# Altium PCB CameraBoard.PcbDoc (part 2 of 2)
Units mm, origin at the board's own origin, x right, y up, seen from the top; angles counter-clockwise.
Board outline 100 x 85.93 mm, 4 copper layers (Top Layer, GND Layer, PWR Layer, Bottom Layer), stack 1.586 mm thick; 79 components, 56 nets, 412 pads, 150 vias.
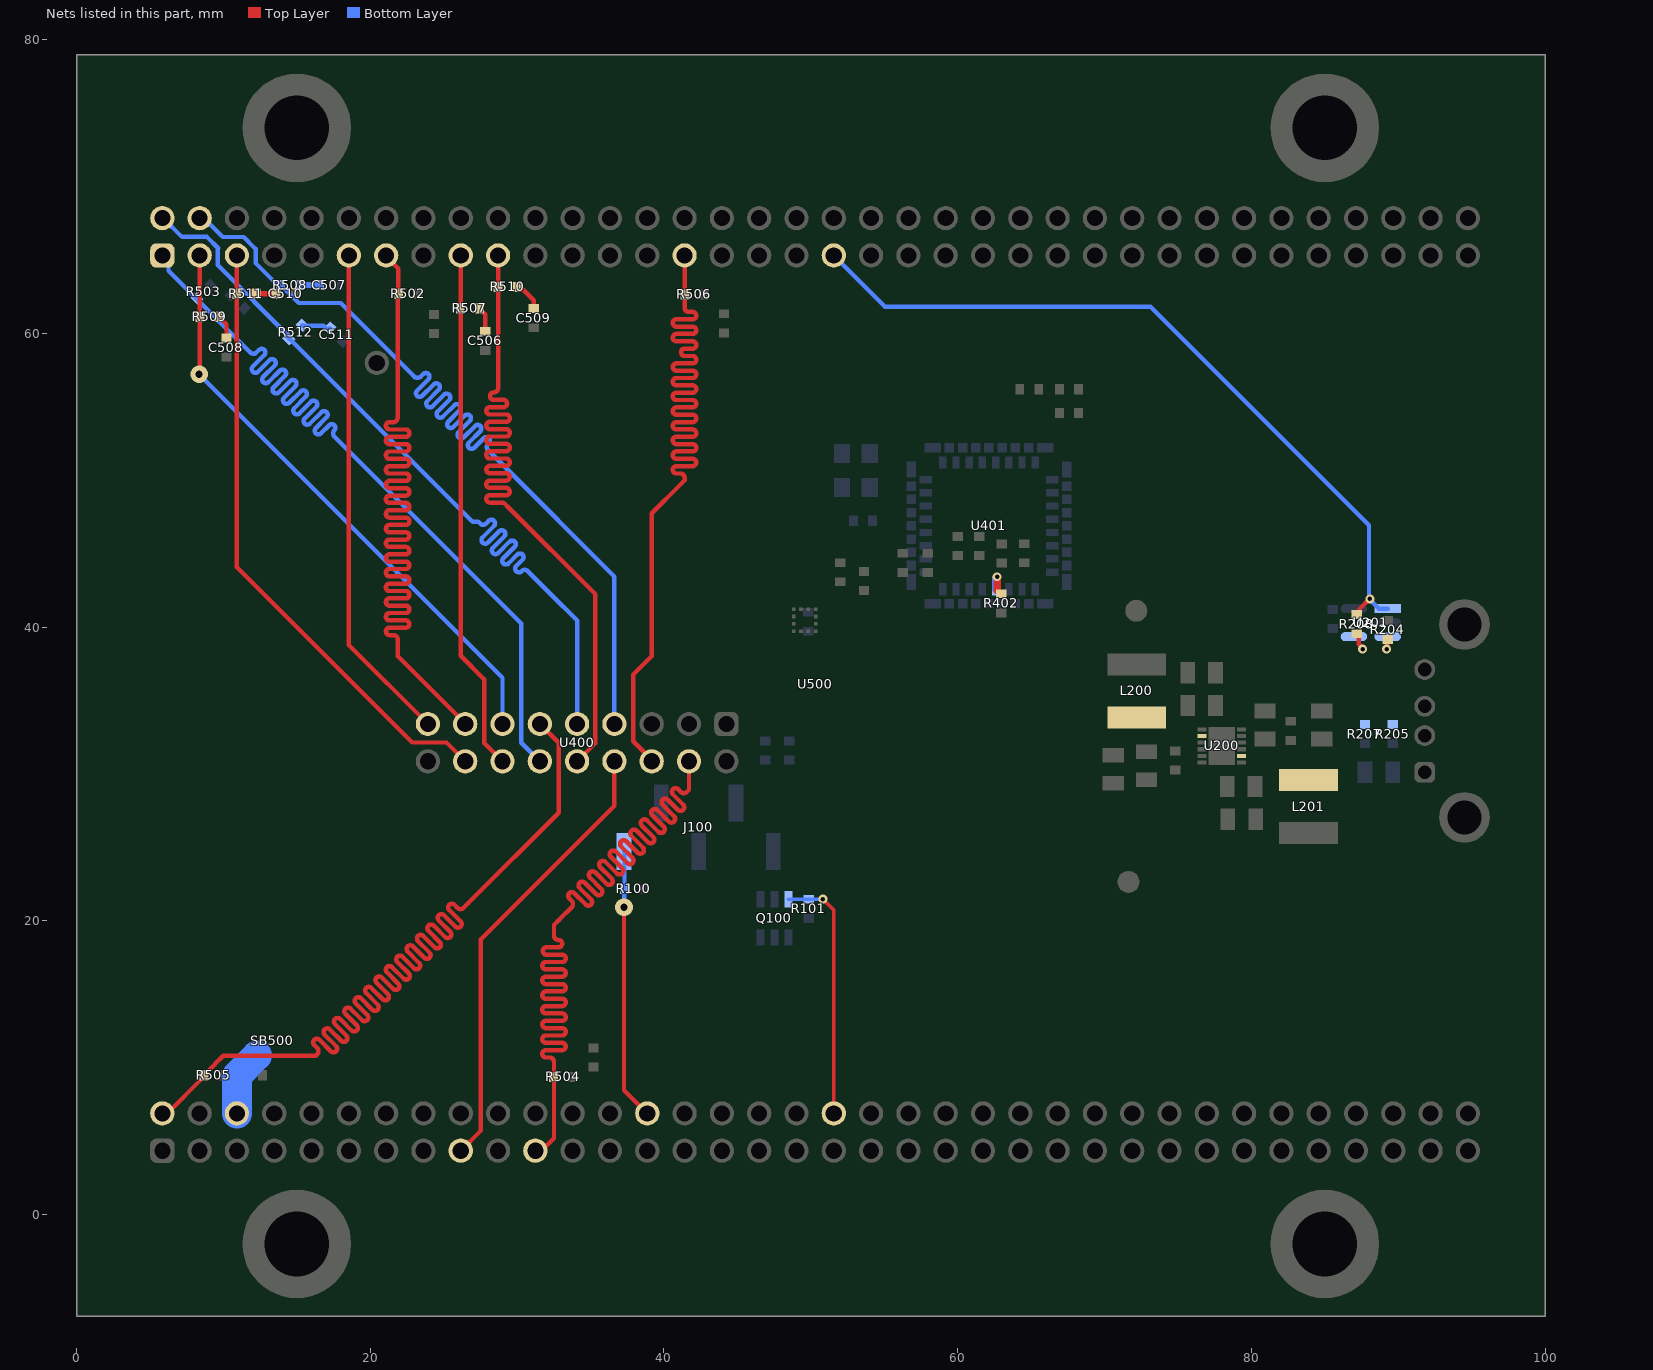
[diagram p4: the nets of this part, all layers, seen from the top]

## Via types
v1: diameter 0.61, hole 0.305, Top Layer to Bottom Layer, tented both sides, 147 vias
v2: diameter 1.2, hole 0.5, Top Layer to Bottom Layer, tented both sides, 2 vias
v3: diameter 0.635, hole 0.305, Top Layer to Bottom Layer, tented both sides, 1 vias

## Nets (pads, with @x,y where several pads share a name; then routed paths per layer and width w, separated by ;. In a path a pad name is that pad's centre, name@x,y a point inside that pad or via, vN(x,y) a via of type N, cw(c..) or ccw(c..) an arc to the next point about the centre after c; other vN are vias at no path point) (continued)
NetC506_1: C506.1 R507.1 | length 1.8
  Top Layer w0.3: R507.1@27.432,61.722 27.432,61.672 27.582,61.522 27.613,61.522 27.838,61.296 C506.1@27.838,60.152
NetC507_1: C507.1 R508.2 | length 1.4
  Bottom Layer w0.381: R508.2@15.194,63.3 C507.1@16.561,63.3 16.608,63.3 C507.1@16.612,63.297
NetC508_1: C508.1 R509.2 | length 1.7
  Top Layer w0.3: R509.2@9.707,61.138 9.707,61.088 9.857,60.938 9.907,60.938 10.211,60.634 C508.1@10.211,59.69
NetC509_1: C509.1 R510.1 | length 2.1
  Top Layer w0.3: R510.1@30.002,63.17 30.002,63.12 30.152,62.97 30.426,62.97 31.125,62.271 31.125,61.712 C509.1@31.14,61.697
NetC510_1: C510.1 R511.1 | length 1.4
  Top Layer w0.381: R511.1@12.222,62.7 13.576,62.7 C510.1@13.589,62.687
NetC511_1: C511.1 R512.2 | length 2
  Bottom Layer w0.3: R512.2@15.372,60.558 15.407,60.523 16.816,60.523 16.999,60.34 17.211,60.34 C511.1@17.247,60.376
NetJ100_1: J100.1 R100.2 U500.28 | length 18.5
  Top Layer w0.3: v2(37.28,20.93) 37.28,8.475 U500.28@38.862,6.893
  Bottom Layer w0.254: J100.1@37.28,24.723 J100.1@37.312,24.691
  Bottom Layer w0.3: v2(37.28,20.93) 37.295,20.944 37.295,22.18 37.312,22.198 J100.1@37.312,24.691
NetL200_1: L200.1 U200.8
NetL201_1: L201.1 U200.2
NetQ100_3: Q100.3 R101.2 U500.38 | length 17.3
  Top Layer w0.254: v1(50.822,21.481) 51.562,20.741 U500.38@51.562,6.893
  Bottom Layer w0.254: Q100.3@48.467,21.474 R101.2@49.866,21.474 49.87,21.477 50.818,21.477 v1(50.822,21.481)
NetR204_2: R204.2 R205.1 U201.3 | length 0.7
  Top Layer w0.3: v1@89.25,38.537 R204.2@89.25,39.129
  Top Layer w0.305: v1(89.215,38.502) v1@89.25,38.537 ; R204.2@89.25,39.129 R204.2@89.285,39.164
NetR207_1: R207.1 R208.2 U201.4 | length 1.2
  Top Layer w0.3: R208.2@87.165,39.556 87.302,39.419 87.302,38.833 87.574,38.561 v1(87.574,38.502)
NetR208_1: R208.1 U201.1 U500.109 | length 52.1
  Top Layer w0.3: R208.1@87.165,40.856 87.215,40.856 87.363,41.004 87.363,41.236 v1(88.062,41.935)
  Bottom Layer w0.3: U500.109@51.562,65.314 55.052,61.824 73.127,61.824 88.011,46.939 88.011,41.986 v1(88.062,41.935) 88.062,41.88 88.682,41.26 U201.1@89.278,41.26
NetR402_2: R402.2 U401.12 | length 2.2
  Top Layer w0.508: v1(62.687,43.434) 62.707,43.415 62.707,42.481 62.914,42.273 R402.2@62.964,42.273
  Bottom Layer w0.508: U401.12@62.581,42.59 62.585,42.594 62.585,43.304 62.687,43.407 v1(62.687,43.434)
NetSB500_1: SB500.1 U500.6 | length 4.5
  Bottom Layer w2.032: U500.6@10.922,6.893 10.922,9.459 12.294,10.831
OV.D0: R508.1 U400.7 U500.76 | length 66.4
  Bottom Layer w0.3: U500.76@8.382,67.853 8.673,67.853 9.959,66.567 11.385,66.567 12.192,65.761 12.192,64.795 13.487,63.5 13.744,63.5 13.894,63.35 R508.1@13.894,63.3 ; R508.1@13.894,63.322 15.138,62.078 17.992,62.078 22.901,57.169 23.007,57.063 ccw(c23.219,57.275) 23.431,57.063 23.608,57.24 cw(c23.785,57.063) 23.961,57.24 cw(c23.785,57.063) 23.961,56.886 23.184,56.109 ccw(c23.36,55.932) 23.184,55.755 ccw(c23.36,55.932) 23.537,55.755 24.315,56.533 cw(c24.492,56.356) 24.669,56.533 cw(c24.492,56.356) 24.669,56.179 23.891,55.401 ccw(c24.067,55.225) 23.891,55.048 ccw(c24.067,55.225) 24.244,55.048 25.022,55.826 cw(c25.199,55.649) 25.376,55.826 cw(c25.199,55.649) 25.376,55.472 24.598,54.694 ccw(c24.775,54.518) 24.598,54.341 ccw(c24.775,54.518) 24.951,54.341 25.729,55.119 cw(c25.906,54.942) 26.083,55.119 cw(c25.906,54.942) 26.083,54.765 25.305,53.987 ccw(c25.482,53.81) 25.305,53.634 ccw(c25.482,53.81) 25.658,53.634 26.436,54.411 cw(c26.613,54.235) 26.79,54.411 cw(c26.613,54.235) 26.79,54.058 26.012,53.28 ccw(c26.189,53.103) 26.012,52.927 ccw(c26.189,53.103) 26.366,52.927 27.143,53.704 cw(c27.32,53.528) 27.497,53.704 cw(c27.32,53.528) 27.497,53.351 26.719,52.573 ccw(c26.896,52.396) 26.719,52.219 ccw(c26.896,52.396) 27.073,52.219 27.726,52.873 cw(c27.903,52.696) 28.08,52.873 cw(c27.903,52.696) 28.08,52.519 28.027,52.467 ccw(c28.239,52.255) 28.027,52.043 28.981,51.089 36.627,43.443 U400.7@36.627,33.407
OV.D1: R510.2 U400.10 U500.91 | length 57.7
  Top Layer w0.3: U500.91@28.702,65.314 28.702,64.407 R510.2@28.702,63.17 28.723,63.149 28.723,62.794 28.702,62.773 28.702,62.621 28.702,56.285 cw(c28.402,56.285) 28.402,55.985 ccw(c28.402,55.735) 28.402,55.485 29.07,55.485 cw(c29.07,55.235) 29.07,54.985 28.152,54.985 ccw(c28.152,54.735) 28.152,54.485 29.252,54.485 cw(c29.252,54.235) 29.252,53.985 28.152,53.985 ccw(c28.152,53.735) 28.152,53.485 29.252,53.485 cw(c29.252,53.235) 29.252,52.985 28.152,52.985 ccw(c28.152,52.735) 28.152,52.485 29.252,52.485 cw(c29.252,52.235) 29.252,51.985 28.152,51.985 ccw(c28.152,51.735) 28.152,51.485 29.252,51.485 cw(c29.252,51.235) 29.252,50.985 28.152,50.985 ccw(c28.152,50.735) 28.152,50.485 29.252,50.485 cw(c29.252,50.235) 29.252,49.985 28.152,49.985 ccw(c28.152,49.735) 28.152,49.485 29.252,49.485 cw(c29.252,49.235) 29.252,48.985 28.152,48.985 ccw(c28.152,48.735) 28.152,48.485 28.905,48.485 cw(c28.905,48.058) 29.207,48.36 29.357,48.21 35.33,42.237 35.33,32.111 U400.10@34.087,30.867
OV.D2: R512.1 U400.9 U500.74 | length 57.3
  Bottom Layer w0.3: U500.74@5.842,67.853 5.911,67.853 7.189,66.576 8.882,66.576 9.648,65.809 ; 9.627,65.811 9.627,64.642 14.453,59.816 R512.1@14.453,59.639 14.5,59.639 26.966,47.173 27.364,47.173 27.47,47.067 ccw(c27.682,47.279) 27.894,47.067 28.071,47.244 cw(c28.247,47.067) 28.424,47.244 cw(c28.247,47.067) 28.424,46.89 27.646,46.113 ccw(c27.823,45.936) 27.646,45.759 ccw(c27.823,45.936) 28,45.759 28.778,46.537 cw(c28.955,46.36) 29.131,46.537 cw(c28.955,46.36) 29.131,46.183 28.354,45.405 ccw(c28.53,45.229) 28.354,45.052 ccw(c28.53,45.229) 28.707,45.052 29.485,45.83 cw(c29.662,45.653) 29.838,45.83 cw(c29.662,45.653) 29.838,45.476 29.061,44.698 ccw(c29.237,44.522) 29.061,44.345 ccw(c29.237,44.522) 29.414,44.345 30.014,44.945 cw(c30.191,44.768) 30.368,44.945 cw(c30.191,44.768) 30.368,44.591 29.945,44.168 ccw(c30.121,43.991) 29.945,43.814 ccw(c30.121,43.991) 30.298,43.814 cw(c30.51,43.602) 30.722,43.814 32.291,42.246 34.087,40.45 U400.9@34.087,33.407
OV.D3: R503.2 U400.12 U500.73 | length 65
  Bottom Layer w0.3: U500.73@5.842,65.314 6.26,64.897 6.26,64.277 8.154,62.382 R503.2@8.204,62.382 8.204,62.333 11.723,58.814 11.829,58.708 ccw(c12.041,58.92) 12.253,58.708 12.43,58.885 cw(c12.606,58.708) 12.783,58.885 cw(c12.606,58.708) 12.783,58.531 12.005,57.754 ccw(c12.182,57.577) 12.005,57.4 ccw(c12.182,57.577) 12.359,57.4 13.137,58.178 cw(c13.314,58.001) 13.49,58.178 cw(c13.314,58.001) 13.49,57.824 12.713,57.046 ccw(c12.889,56.87) 12.713,56.693 ccw(c12.889,56.87) 13.066,56.693 13.844,57.471 cw(c14.021,57.294) 14.197,57.471 cw(c14.021,57.294) 14.197,57.117 13.42,56.339 ccw(c13.596,56.163) 13.42,55.986 ccw(c13.596,56.163) 13.773,55.986 14.551,56.764 cw(c14.728,56.587) 14.905,56.764 cw(c14.728,56.587) 14.905,56.41 14.127,55.632 ccw(c14.304,55.455) 14.127,55.279 ccw(c14.304,55.455) 14.48,55.279 ; 14.48,55.279 15.258,56.056 cw(c15.435,55.88) 15.612,56.056 cw(c15.435,55.88) 15.612,55.703 14.834,54.925 ccw(c15.011,54.748) 14.834,54.572 ccw(c15.011,54.748) 15.187,54.572 15.965,55.349 cw(c16.142,55.173) 16.319,55.349 cw(c16.142,55.173) 16.319,54.996 15.541,54.218 ccw(c15.718,54.041) 15.541,53.864 ccw(c15.718,54.041) 15.895,53.864 16.672,54.642 cw(c16.849,54.465) 17.026,54.642 cw(c16.849,54.465) 17.026,54.289 16.29,53.552 ; 16.29,53.552 ccw(c16.466,53.376) 16.29,53.199 ccw(c16.466,53.376) 16.643,53.199 17.203,53.758 cw(c17.379,53.582) 17.556,53.758 cw(c17.379,53.582) 17.556,53.405 ccw(c17.768,53.193) 17.556,52.981 18.79,51.747 30.283,40.254 30.283,32.131 U400.12@31.547,30.867
OV.D4: R505.1 U400.11 U500.2 | length 79.3
  Top Layer w0.3: U500.2@5.842,6.893 6.181,6.893 8.687,9.399 R505.1@8.687,9.5 9.399,10.211 9.399,10.235 9.981,10.817 16.28,10.817 16.387,10.923 ccw(c16.174,11.135) 16.387,11.348 16.184,11.55 cw(c16.361,11.726) 16.184,11.903 cw(c16.361,11.727) 16.538,11.903 17.316,11.125 ccw(c17.492,11.302) 17.669,11.125 ccw(c17.492,11.302) 17.669,11.479 16.891,12.257 cw(c17.068,12.434) 16.891,12.61 cw(c17.068,12.434) 17.245,12.61 18.023,11.833 ccw(c18.2,12.009) 18.376,11.833 ccw(c18.2,12.009) 18.376,12.186 17.599,12.964 cw(c17.775,13.141) 17.599,13.317 cw(c17.775,13.141) 17.952,13.317 18.73,12.54 ccw(c18.907,12.716) 19.083,12.54 ccw(c18.907,12.716) 19.083,12.893 18.306,13.671 cw(c18.482,13.848) 18.306,14.025 cw(c18.482,13.848) 18.659,14.025 19.437,13.247 ccw(c19.614,13.424) 19.791,13.247 ccw(c19.614,13.424) 19.791,13.6 19.013,14.378 cw(c19.19,14.555) 19.013,14.732 cw(c19.19,14.555) 19.366,14.732 20.144,13.954 ccw(c20.321,14.131) 20.498,13.954 ccw(c20.321,14.131) 20.498,14.307 19.72,15.085 cw(c19.897,15.262) 19.72,15.439 cw(c19.897,15.262) 20.073,15.439 20.851,14.661 ccw(c21.028,14.838) 21.205,14.661 ccw(c21.028,14.838) 21.205,15.015 20.427,15.792 cw(c20.604,15.969) 20.427,16.146 cw(c20.604,15.969) 20.781,16.146 21.558,15.368 ccw(c21.735,15.545) 21.912,15.368 ccw(c21.735,15.545) 21.912,15.722 21.134,16.499 cw(c21.311,16.676) 21.134,16.853 cw(c21.311,16.676) 21.488,16.853 22.265,16.075 ccw(c22.442,16.252) 22.619,16.075 ccw(c22.442,16.252) 22.619,16.429 21.841,17.207 cw(c22.018,17.383) 21.841,17.56 cw(c22.018,17.383) 22.195,17.56 22.973,16.782 ccw(c23.149,16.959) 23.326,16.782 ccw(c23.149,16.959) 23.326,17.136 22.548,17.914 cw(c22.725,18.09) 22.548,18.267 cw(c22.725,18.09) 22.902,18.267 23.68,17.489 ccw(c23.856,17.666) 24.033,17.489 ccw(c23.856,17.666) 24.033,17.843 23.255,18.621 cw(c23.432,18.798) 23.255,18.974 cw(c23.432,18.798) 23.609,18.974 24.387,18.197 ccw(c24.564,18.373) 24.74,18.197 ccw(c24.564,18.373) 24.74,18.55 23.963,19.328 cw(c24.139,19.505) 23.963,19.681 cw(c24.139,19.505) 24.316,19.681 25.094,18.904 ccw(c25.271,19.08) 25.447,18.904 ccw(c25.271,19.08) 25.447,19.257 24.67,20.035 cw(c24.846,20.212) 24.67,20.389 cw(c24.846,20.212) 25.023,20.389 25.801,19.611 ccw(c25.978,19.787) 26.155,19.611 ccw(c25.978,19.788) 26.155,19.964 25.377,20.742 cw(c25.553,20.919) 25.377,21.096 cw(c25.553,20.919) 25.73,21.096 25.932,20.893 ccw(c26.145,21.106) 26.357,20.893 26.678,21.215 32.828,27.365 32.828,32.126 U400.11@31.547,33.407
OV.D5: R507.2 U400.14 U500.89 | length 35.6
  Top Layer w0.3: U500.89@26.162,65.314 26.162,61.752 R507.2@26.132,61.722 26.162,61.692 26.162,38.049 27.766,36.445 27.766,32.108 U400.14@29.007,30.867
OV.D6: R509.1 U400.13 U500.75 | length 40.5
  Top Layer w0.3: v2(8.344,57.216) 8.401,57.272 8.401,61.131 R509.1@8.407,61.138 8.401,61.145 8.401,65.296 U500.75@8.382,65.314
  Bottom Layer w0.3: v2(8.344,57.216) 29.007,36.552 U400.13@29.007,33.407
OV.D7: R511.2 U400.16 U500.77 | length 42.3
  Top Layer w0.3: U500.77@10.922,65.314 10.922,62.687 10.922,44.077 22.853,32.146 25.188,32.146 U400.16@26.467,30.867
OV.DCLK: R502.2 U400.15 U500.85 | length 74
  Top Layer w0.3: U500.85@21.082,65.314 21.082,65.242 21.9,64.424 21.9,62.754 R502.2@21.941,62.713 ; R502.2@21.868,62.609 21.868,55.606 21.868,54.264 cw(c21.568,54.264) 21.568,53.964 21.318,53.964 ccw(c21.318,53.714) 21.318,53.464 22.418,53.464 cw(c22.418,53.214) 22.418,52.964 21.318,52.964 ccw(c21.318,52.714) 21.318,52.464 22.418,52.464 cw(c22.418,52.214) 22.418,51.964 21.318,51.964 ccw(c21.318,51.714) 21.318,51.464 22.418,51.464 cw(c22.418,51.214) 22.418,50.964 21.318,50.964 ccw(c21.318,50.714) 21.318,50.464 22.418,50.464 cw(c22.418,50.214) 22.418,49.964 21.318,49.964 ccw(c21.318,49.714) 21.318,49.464 22.418,49.464 cw(c22.418,49.214) 22.418,48.964 21.318,48.964 ccw(c21.318,48.714) 21.318,48.464 22.418,48.464 cw(c22.418,48.214) 22.418,47.964 21.318,47.964 ccw(c21.318,47.714) 21.318,47.464 22.418,47.464 cw(c22.418,47.214) 22.418,46.964 21.318,46.964 ccw(c21.318,46.714) 21.318,46.464 22.418,46.464 cw(c22.418,46.214) 22.418,45.964 21.318,45.964 ccw(c21.318,45.714) 21.318,45.464 22.418,45.464 cw(c22.418,45.214) 22.418,44.964 21.318,44.964 ccw(c21.318,44.714) 21.318,44.464 22.418,44.464 cw(c22.418,44.214) 22.418,43.964 21.318,43.964 ccw(c21.318,43.714) 21.318,43.464 22.418,43.464 cw(c22.418,43.214) 22.418,42.964 21.318,42.964 ccw(c21.318,42.714) 21.318,42.464 22.418,42.464 cw(c22.418,42.214) 22.418,41.964 21.318,41.964 ccw(c21.318,41.714) 21.318,41.464 22.418,41.464 cw(c22.418,41.214) 22.418,40.964 21.318,40.964 ccw(c21.318,40.714) 21.318,40.464 22.418,40.464 cw(c22.418,40.214) 22.418,39.964 21.318,39.964 ccw(c21.318,39.714) 21.318,39.464 21.568,39.464 cw(c21.568,39.164) 21.868,39.164 21.868,39.014 21.868,38.033 U400.15@26.467,33.434
OV.HREF: R506.2 U400.6 U500.101 | length 65.5
  Top Layer w0.3: U400.6@39.165,30.869 39.165,30.978 37.907,32.236 37.907,36.774 39.165,38.032 39.165,47.765 41.118,49.718 41.402,50.002 41.402,50.168 ccw(c41.102,50.168) 41.102,50.468 40.852,50.468 cw(c40.852,50.718) 40.852,50.968 41.952,50.968 ccw(c41.952,51.218) 41.952,51.468 40.852,51.468 cw(c40.852,51.718) 40.852,51.968 41.952,51.968 ccw(c41.952,52.218) 41.952,52.468 40.852,52.468 cw(c40.852,52.718) 40.852,52.968 41.952,52.968 ccw(c41.952,53.218) 41.952,53.468 40.852,53.468 cw(c40.852,53.718) 40.852,53.968 41.952,53.968 ccw(c41.952,54.218) 41.952,54.468 40.852,54.468 cw(c40.852,54.718) 40.852,54.968 41.952,54.968 ccw(c41.952,55.218) 41.952,55.468 40.852,55.468 cw(c40.852,55.718) 40.852,55.968 41.952,55.968 ccw(c41.952,56.218) 41.952,56.468 40.852,56.468 cw(c40.852,56.718) 40.852,56.968 41.952,56.968 ccw(c41.952,57.218) 41.952,57.468 40.852,57.468 cw(c40.852,57.718) 40.852,57.968 41.952,57.968 ccw(c41.952,58.218) 41.952,58.468 41.408,58.468 cw(c41.408,58.718) 41.408,58.968 41.952,58.968 ccw(c41.952,59.218) 41.952,59.468 40.852,59.468 cw(c40.852,59.718) 40.852,59.968 41.952,59.968 ccw(c41.952,60.218) 41.952,60.468 40.852,60.468 cw(c40.852,60.718) 40.852,60.968 41.952,60.968 ccw(c41.952,61.218) 41.952,61.468 41.702,61.468 cw(c41.702,61.768) 41.402,61.768 41.402,62.654 U500.101@41.402,65.314
OV.PWDN: U400.17 U500.83 | length 34.1
  Top Layer w0.3: U500.83@18.542,65.314 18.542,38.792 U400.17@23.927,33.407
OV.RST: U400.8 U500.17 | length 30.8
  Top Layer w0.3: U500.17@26.162,4.353 27.534,5.725 27.534,18.751 36.627,27.844 U400.8@36.627,30.867
OV.VSYNC: R504.1 U400.4 U500.21 | length 81
  Top Layer w0.3: U500.21@31.242,4.353 31.664,4.353 32.512,5.201 32.512,10.25 32.512,10.4 ccw(c32.212,10.4) 32.212,10.7 31.962,10.7 cw(c31.962,10.95) 31.962,11.2 33.062,11.2 ccw(c33.062,11.45) 33.062,11.7 31.962,11.7 cw(c31.962,11.95) 31.962,12.2 33.062,12.2 ccw(c33.062,12.45) 33.062,12.7 31.962,12.7 cw(c31.962,12.95) 31.962,13.2 33.062,13.2 ccw(c33.062,13.45) 33.062,13.7 31.962,13.7 cw(c31.962,13.95) 31.962,14.2 33.062,14.2 ccw(c33.062,14.45) 33.062,14.7 31.962,14.7 cw(c31.962,14.95) 31.962,15.2 33.062,15.2 ccw(c33.062,15.45) 33.062,15.7 31.962,15.7 cw(c31.962,15.95) 31.962,16.2 33.062,16.2 ccw(c33.062,16.45) 33.062,16.7 31.962,16.7 cw(c31.962,16.95) 31.962,17.2 33.062,17.2 ccw(c33.062,17.45) 33.062,17.7 32.001,17.7 cw(c32.001,17.95) 32.001,18.2 32.812,18.2 ccw(c32.812,18.45) 32.812,18.7 cw(c32.812,19) 32.512,19 32.512,19.563 32.512,19.726 32.861,20.075 32.908,20.123 33.721,20.936 ccw(c33.509,21.148) 33.721,21.36 33.545,21.537 cw(c33.721,21.714) 33.545,21.89 cw(c33.721,21.714) 33.898,21.89 34.676,21.113 ccw(c34.853,21.289) 35.03,21.113 ccw(c34.853,21.289) 35.03,21.466 34.252,22.244 cw(c34.429,22.421) 34.252,22.598 cw(c34.429,22.421) 34.605,22.598 35.383,21.82 ccw(c35.56,21.996) 35.737,21.82 ccw(c35.56,21.996) 35.737,22.173 34.959,22.951 cw(c35.136,23.128) 34.959,23.305 cw(c35.136,23.128) 35.312,23.305 36.09,22.527 ccw(c36.267,22.704) 36.444,22.527 ccw(c36.267,22.704) 36.444,22.88 35.666,23.658 cw(c35.843,23.835) 35.666,24.012 cw(c35.843,23.835) 36.02,24.012 36.797,23.234 ccw(c36.974,23.411) 37.151,23.234 ccw(c36.974,23.411) 37.151,23.587 36.373,24.365 cw(c36.55,24.542) 36.373,24.719 cw(c36.55,24.542) 36.727,24.719 37.504,23.941 ccw(c37.681,24.118) 37.858,23.941 ccw(c37.681,24.118) 37.858,24.295 37.08,25.072 cw(c37.257,25.249) 37.08,25.426 cw(c37.257,25.249) 37.434,25.426 38.212,24.648 ccw(c38.388,24.825) 38.565,24.648 ccw(c38.388,24.825) 38.565,25.002 37.787,25.78 cw(c37.964,25.956) 37.787,26.133 cw(c37.964,25.956) 38.141,26.133 38.919,25.355 ccw(c39.095,25.532) 39.272,25.355 ccw(c39.095,25.532) 39.272,25.709 38.494,26.487 cw(c38.671,26.663) 38.494,26.84 cw(c38.671,26.663) 38.848,26.84 39.626,26.062 ccw(c39.803,26.239) 39.979,26.062 ccw(c39.803,26.239) 39.979,26.416 39.202,27.194 cw(c39.378,27.37) 39.202,27.547 cw(c39.378,27.37) 39.555,27.547 40.333,26.769 ccw(c40.51,26.946) 40.686,26.769 ccw(c40.51,26.946) 40.686,27.123 39.909,27.901 cw(c40.085,28.078) 39.909,28.254 cw(c40.085,28.078) 40.262,28.254 40.947,27.57 ccw(c41.124,27.746) 41.3,27.57 ccw(c41.124,27.746) 41.3,27.923 40.616,28.608 cw(c40.792,28.785) 40.616,28.961 cw(c40.792,28.785) 40.969,28.961 41.146,28.785 ccw(c41.358,28.997) 41.57,28.785 41.707,28.921 41.707,30.23 U400.4@41.707,30.867
pads on no net: J200.2 J200.3 U200.5 U200.11 U401.3 U401.4 U401.5 U401.17 U401.28 U401.29 U401.31 U401.32 U500.1 U500.3 U500.4 U500.5 U500.7 U500.9 U500.10 U500.11 U500.12 U500.13 U500.14 U500.15 U500.16 U500.18 U500.23 U500.24 U500.25 U500.26 U500.27 U500.29 U500.30 U500.31 U500.32 U500.33 U500.34 U500.35 U500.36 U500.37 U500.39 U500.41 U500.42 U500.44 U500.47 U500.48 U500.51 U500.52 U500.53 U500.54 U500.55 U500.56 U500.57 U500.58 U500.59 U500.61 U500.63 U500.64 U500.65 U500.66 U500.67 U500.68 U500.69 U500.70 U500.71 U500.72 U500.78 U500.79 U500.80 U500.82 U500.84 U500.86 U500.87 U500.88 U500.90 U500.93 U500.94 U500.95 U500.96 U500.97 U500.98 U500.99 U500.100 U500.102 U500.103 U500.104 U500.105 U500.106 U500.107 U500.108 U500.110 U500.112 U500.114 U500.116 U500.117 U500.118 U500.119 U500.120 U500.121 U500.122 U500.124 U500.128 U500.129 U500.130 U500.131 U500.132 U500.133 U500.134 U500.136 U500.137 U500.138 U500.139 U500.140 U500.141 U500.142 U500.143 U500.144 U501.4 U501.8 U501.10 U501.11

## Polygon pours and split planes (outlines as drawn)
5V on Bottom Layer "NONET_L-01_P-001" (solid, pour order 14): 87.657,41.742 87.463,41.935 84.354,41.935 84.354,40.367 84.582,40.367 85.436,40.828 87.753,40.828 88.005,41.081 87.988,41.099 87.988,41.595
GND on Bottom Layer "NONET_L-01_P-001" (solid, remove dead copper, pour order 57): 0,-6.934 100,-6.934 100,78.994 0,78.994
5V on Bottom Layer "NONET_L-01_P-001" (solid, pour order 27): 88.384,29.242 88.349,29.277 88.349,32.601 87.139,32.601 84.213,35.527 74.219,35.527 74.219,30.298 76.222,28.296 86.133,28.296 88.349,28.296
NetR204_2 on Bottom Layer "NONET_L-01_P-001" (solid, pour order 31): 89.992,33.065 89.992,39.634 89.929,39.697 88.43,39.697 88.43,39.621 88.367,39.557 88.367,38.923 89.278,38.011 89.278,33.043
NetR207_1 on Bottom Layer "NONET_L-01_P-001" (solid, pour order 28): 88.059,33.043 88.059,39.348 87.681,39.726 86.182,39.726 86.182,39.649 86.03,39.497 86.03,39.04 87.351,37.719 87.351,33.02
2V8 on Bottom Layer "NONET_L-01_P-001" (solid, pour order 56): 52,31.879 52.958,30.92 52.958,30.837 52,29.879 52,29.383 57.567,29.383 57.567,32.537 52,32.537
5V on Bottom Layer "NONET_L-01_P-001" (solid, pour order 54): 13.083,12.468 14,12.468 14,11.203 14.707,10.496 15.239,10.496 19.17,14.428 15.723,17.875 11.802,17.875 12,12.468
2V8 on Bottom Layer "NONET_L-01_P-001" (solid, pour order 34): 58.356,44.013 58.375,44.032 59.223,44.032 59.223,42.066 59.2,42.042 57.87,42.042 57.87,41.927 57.812,41.869 57.158,42.523 57.939,43.303 57.939,43.409 58.333,43.409 58.341,43.4 58.343,43.403 58.343,43.993
2V8 on Bottom Layer "NONET_L-01_P-001" (solid, pour order 36): 52.621,50.11 52.621,48.938 52.621,48.828 52.248,48.417 52.309,46.856 53.695,46.856 53.695,50.104 55.618,50.104 55.958,49.764 55.958,47.894 54.226,46.162 54.225,46.164 51.521,46.164 51.521,50.085 51.546,50.11
LED_GND on Bottom Layer "NONET_L-01_P-001" (solid, pour order 55): 41,22.862 ccw(c46,22.862) 46,17.862 48,17.862 48,26.046 41.248,26.046 41,25.798
5V on Bottom Layer "NONET_L-01_P-001" (solid, pour order 39): 38.862,29.537 38.862,26.253 48,26.253 48,29.537 46.567,29.537
GND on Top Layer "NONET_L-01_P-001" (solid, remove dead copper, pour order 52): 0.345,-6.934 100.345,-6.934 100.345,78.994 0.345,78.994
NetL201_1 on Top Layer "NONET_L-01_P-001" (solid, pour order 29): 79.019,30.937 81.559,30.736 81.559,28.743 85.929,28.743 85.943,28.756 85.924,28.775 85.924,30.736 85.28,31.379 79.019,31.379
5V on Top Layer "NONET_L-01_P-001" (solid, pour order 46): 79.019,30.937 81.559,30.937 81.559,28.169 79.578,28.169 79.578,30.328 79.502,30.404 79.019,30.404
5V on Top Layer "NONET_L-01_P-001" (solid, pour order 47): 74.27,33.416 74.27,35.484 76.276,35.484 76.403,35.357 76.403,33.782 76.454,33.782 77.013,33.223 77.013,32.868 76.886,32.868 74.855,32.893
NetL200_1 on Top Layer "NONET_L-01_P-001" (solid, pour order 25): 77.013,32.77 77.013,32.384 77.002,32.373 76.998,32.378 74.121,32.378 73.394,33.105 73.385,33.096 70.183,33.096 70.183,34.622 70.188,34.627 70.189,34.626 74.281,34.626 74.29,34.617 74.27,34.596 74.27,33.701 74.332,33.416 74.954,32.795
2V8 on Top Layer "NONET_L-01_P-001" (solid, pour order 30): 69.707,28.146 68.857,28.995 68.923,32.137 67.749,32.137 64.795,32.137 64.795,29.969 68.162,26.602 68.218,26.657 68.218,28.088 69.649,28.088
1V2 on Top Layer "NONET_L-01_P-001" (solid, pour order 48): 67.168,38.71 66.153,38.71 63.918,43.176 62.391,43.896 62.391,44.702 62.391,44.935 65.941,44.935 68.377,40.843
NetC204_2 on Top Layer "NONET_L-01_P-001" (solid, pour order 49): 84.942,28.537 82.095,28.537 81.598,28.039 79.731,28.039 79.731,26.695 78.572,25.537 76.976,25.537 75.692,26.82 75.692,30.666 72.097,30.666 71.671,30.24 71.671,28.087 70.012,28.039 68.486,26.278 69.494,22.87 83.078,22.773 86.131,25.222 86.131,28.537
NetC200_2 on Top Layer "NONET_L-01_P-001" (solid, pour order 50): 80.19,33.752 79.19,34.752 79.19,38.537 77.037,38.537 76.19,37.689 76.19,36.537 76.19,35.537 75.971,35.537 69.19,35.537 68.796,38.659 69.138,40.464 68.796,40.806 78.932,40.806 83.6,36.137 83.6,33.752
COMPASS_SCL on Top Layer "NONET_L-01_P-001" (solid, pour order 53): 44.247,40.459 44.247,46.231 ccw(c47.133,46.671) 47.573,43.785 47.563,43.785 ccw(c47.98,42.127) 46.322,41.71 ccw(c45.91,40.047)
2V8 on Top Layer "NONET_L-01_P-001" (solid, pour order 51): 67.436,52.537 70,55.101 70,58.537 68.837,58.537 67.634,57.334 67.634,55.221 66.153,53.74 67.357,52.537
5V on PWR Layer "NONET_L-01_P-001" (solid, pour order 17): 93.522,35.554 87.122,44.552 86.212,44.552 71.353,33.781 67.713,29.537 26,29.537 8,11.537 23.381,11.537 33.977,22.133 93.522,22.133
GND on PWR Layer "NONET_L-01_P-001" (solid, pour order 23): 0,78.994 0,-6.934 99.873,-6.934 99.797,35.712 99.863,78.994
2V8 on PWR Layer "NONET_L-01_P-001" (solid, pour order 22): 67.713,29.537 67.584,29.537 52,29.537 52,34.537 46,40.537 53.634,48.171 60.634,48.171 67,54.537 67,57.537 69,57.537 71.353,55.184 71.353,33.781 70.872,33.102
no net on Top Solder "NONET_L-01_P-001" (solid): 90.867,34.726 90.867,32.513 92.487,32.513 92.487,34.726
no net on Top Solder "NONET_L-01_P-001" (solid): 94,35.429 94.002,35.427 94.002,31.537 96.164,31.537 96.164,35.429
no net on Bottom Solder "NONET_L-01_P-001" (solid, pour order 35): 90.99,34.726 90.99,32.513 92.61,32.513 92.61,34.726
no net on Bottom Solder "NONET_L-01_P-001" (solid, pour order 37): 94,35.429 94.002,35.427 94.002,31.537 96.164,31.537 96.164,35.429
GND on GND Layer "NONET_L-01_P-001" (solid, pour order 24): 0.023,78.994 0.023,-6.934 100.023,-6.934 100.023,78.994

## Keep-outs
Keep-Out Layer:
  the board outline again, w0.127

## Other copper
Top Layer:
  pour cut-out: 63.519,43.473 63.581,43.473 64.381,42.673 64.381,24.287 62.964,22.87 62.964,10.732 62.691,10.732 61.497,9.537 61.722,9.311 61.722,6.893 60.47,6.893 60.433,6.931 60.433,43.156 60.783,43.507

## Silkscreen, mask and mechanical layers (free items; w line width, h text height)
Top Overlay:
  text "Simonas Riauka, / Arnas Piaulokas, / Aurimas Junevičius / EEI-0/3, 2023" at 99.187,45.618 h1.02 r90
Board:
  lines w0.254: 47.447,21.448 47.447,23.207

## Text inside footprints (layer, text, board x,y; h text height)
J200: Route Tool Path "PCB Edge" at 106.01,31.419 h1.02 r90
U400: Board "17" at 22.247,32.907 h1.02; Board "18" at 22.247,30.407 h1.02
U500: Top Overlay "71" at 97,64.746 h1.02; Top Overlay "2" at 2.997,67.488 h1.02; Top Overlay "72" at 97,67.496 h1.02; Top Overlay "1" at 3.175,64.745 h1.02; Top Overlay "2" at 3.099,6.528 h1.02; Top Overlay "1" at 3.226,3.835 h1.02; Top Overlay "72" at 97,6.536 h1.02; Top Overlay "71" at 97,3.785 h1.02